# Altium PCB PCB1.PcbDoc
Units mm, origin at the board's own origin, x right, y up, seen from the top; angles counter-clockwise.
Board outline 103.8 x 74.9 mm, 2 copper layers (Top Layer, Bottom Layer); 9 components, 7 nets, 75 pads, 3 vias.
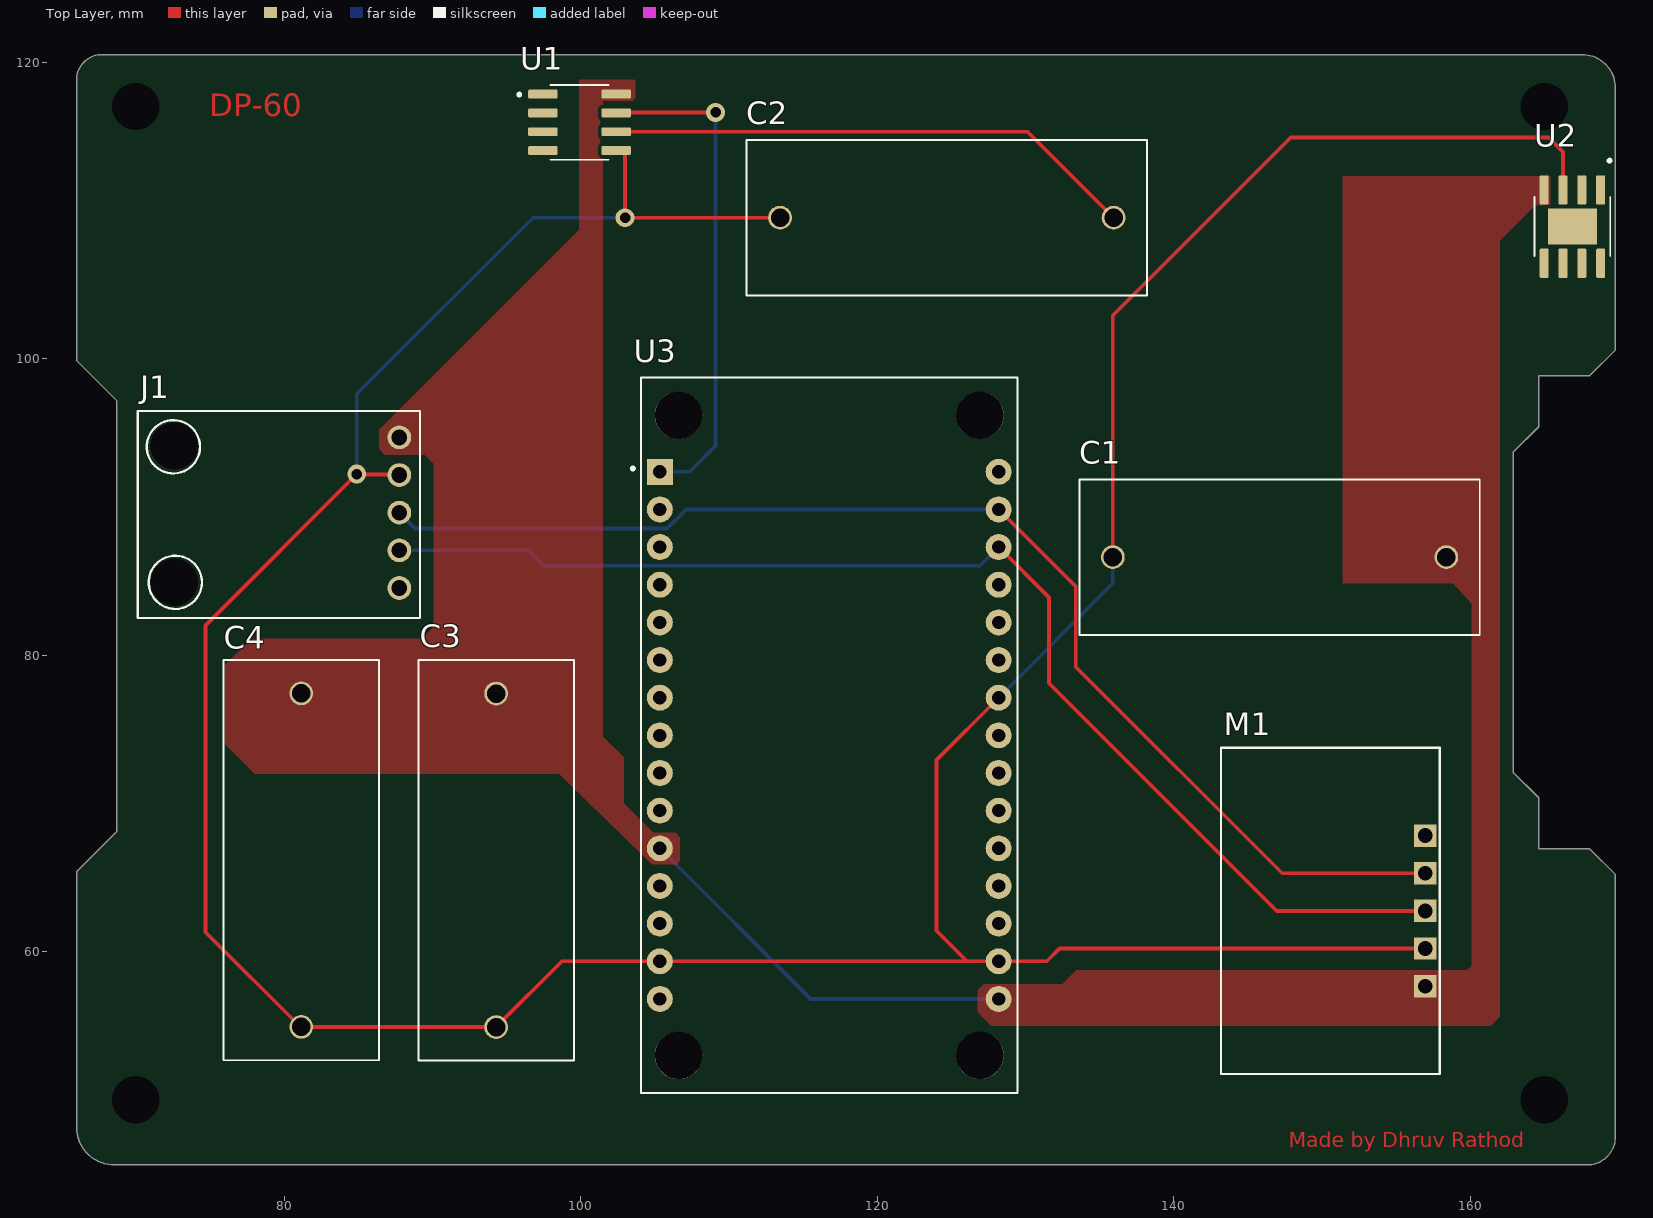
[diagram p0: Top Layer view]
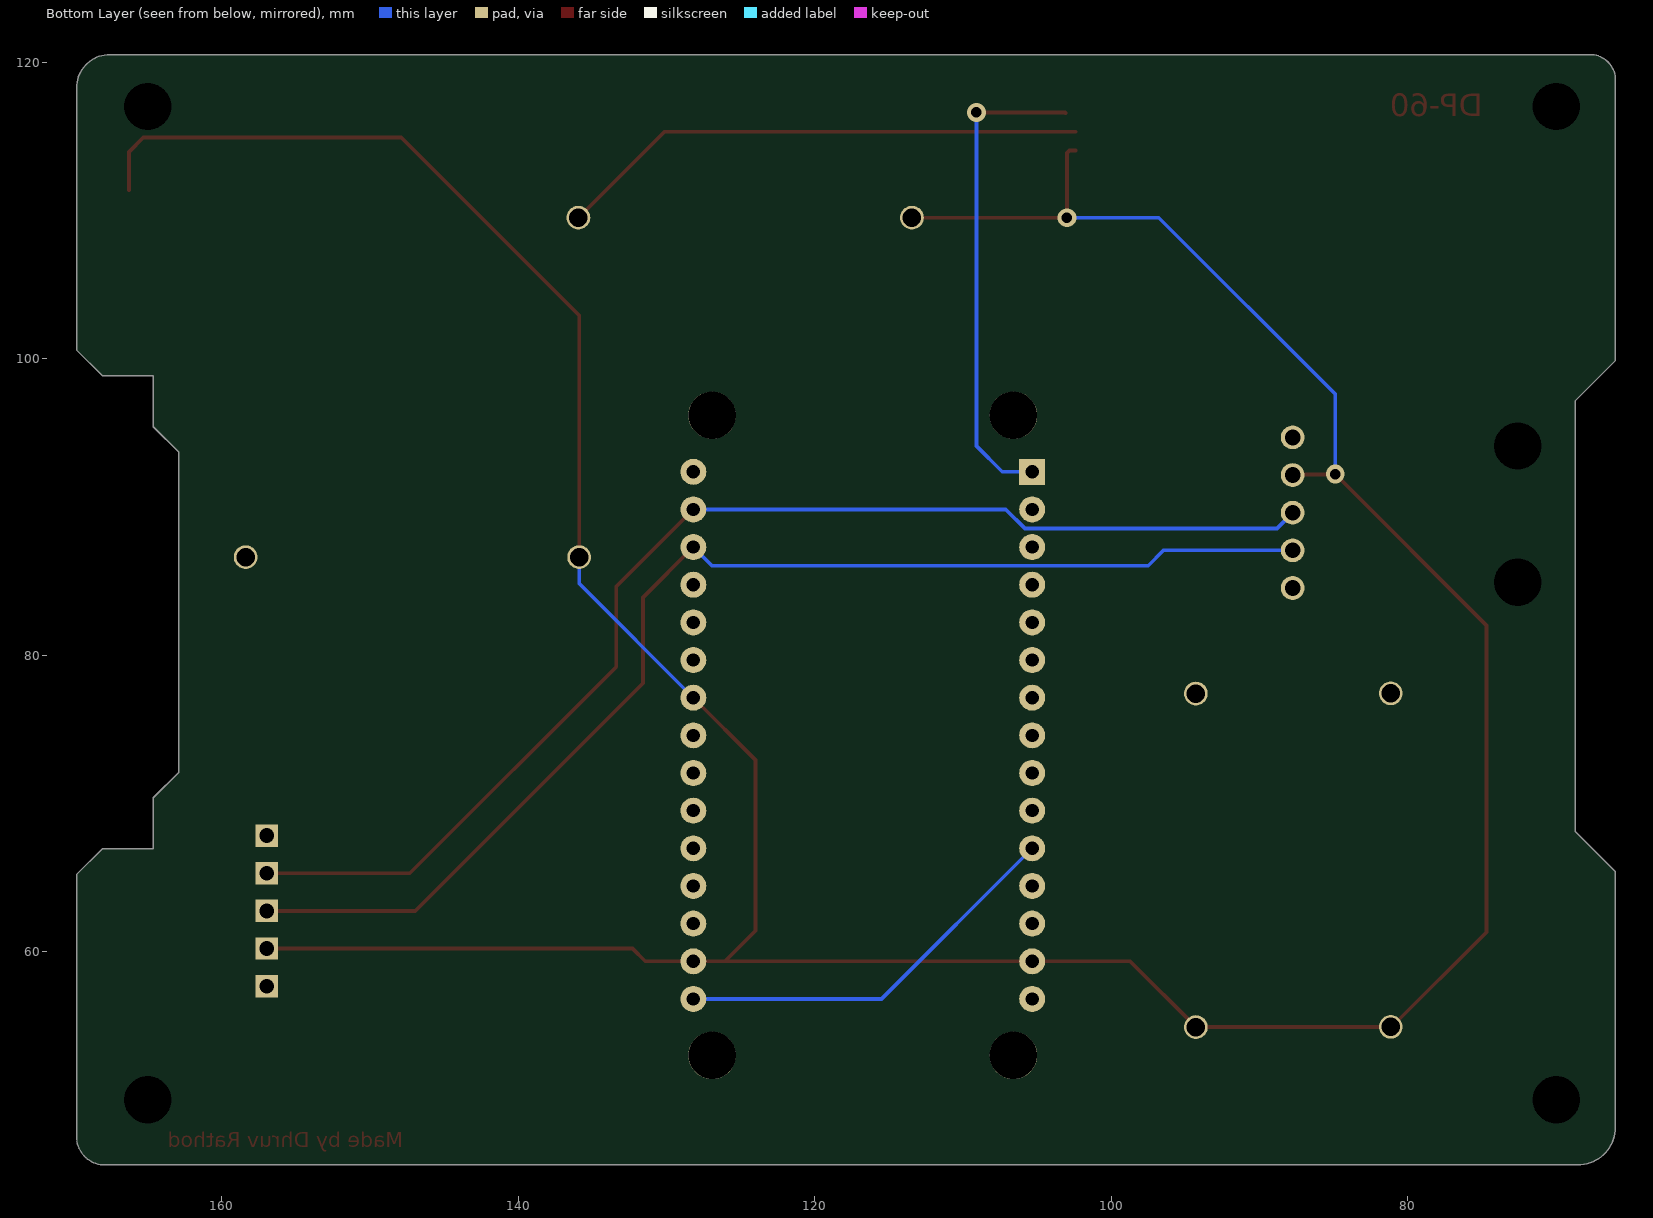
[diagram p1: Bottom Layer view, seen from below]
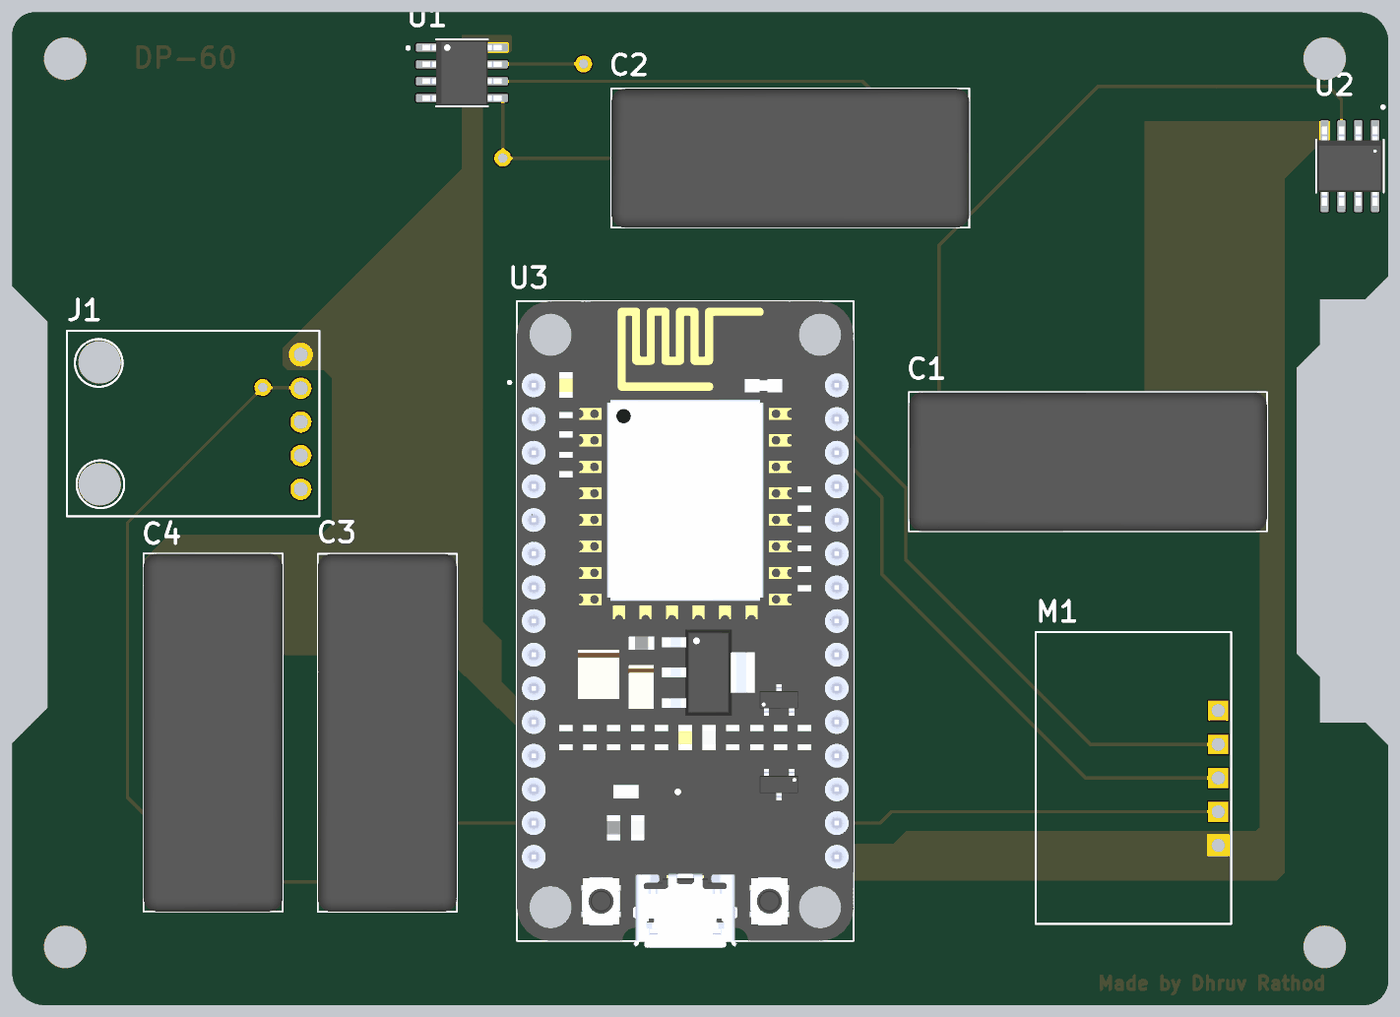
[diagram p2: 3D render of the assembled board from above, using the file's embedded part models]

## Layer stack, top to bottom
Top Solder: solder mask 0.0102, Solder Resist, Dk 3.5
Top Layer: signal copper 0.0356
Dielectric 1: dielectric 0.32, FR-4, Dk 4.8
Bottom Layer: signal copper 0.0356
Bottom Solder: solder mask 0.0102, Solder Resist, Dk 3.5

## Board outline
66,48.14 ccw(c68.54,48.14) 68.54,45.6 167.9,45.6 ccw(c167.9,47.5) 169.8,47.5 169.8,65.19 168.075,66.915 164.625,66.915 164.625,70.365 162.9,72.09 162.9,93.67 164.625,95.395 164.625,98.845 168.075,98.845 169.8,100.57 169.8,118.26 ccw(c167.56,118.26) 167.56,120.5 67.7,120.5 ccw(c67.7,118.8) 66,118.8 66,99.86 68.7,97.16 68.7,68.08 66,65.38

## Design rules (kind name [scope] priority, off if disabled: settings)
Clearance [All] p1: gap=0.254 ignorepadtopadclearanceinfootprint=FALSE
HoleSize HoleSize_1 [All] p1: absolutevalues=TRUE maxlimit=3.3 minlimit=0.025 maxpercent=80.000 minpercent=20.000
MinimumSolderMaskSliver "Sensor_SolderMask_Exception  " [Component = 'U2'] p1: minsoldermaskwidth=0.07
MinimumSolderMaskSliver [All] p2: minsoldermaskwidth=0.254
PolygonConnect [All] p1: connectstyle=Direct reliefconductorwidth=0.254 reliefentries=4 polygonreliefangle="90 Angle" airgapwidth=0.254
RoutingVias [All] p1: holewidth=0.711 width=1.27 viastyle="Through Hole" minholewidth=0.711 minwidth=1.27 maxholewidth=0.711 maxwidth=1.27
SilkToSolderMaskClearance Exception_For_Components [Component = 'M1'] p1: minsilkscreentomaskgap=0.14 clearancetoexposedcopper=TRUE
SilkToSolderMaskClearance SilkToSolderMaskClearance_1 [IsPad] p2: minsilkscreentomaskgap=0.254 clearancetoexposedcopper=TRUE
SolderMaskExpansion [All] p1: expansion=0.102 istentingtop=FALSE
SupplyNets "Schematic Supply Nets_1" [InNet('GND')] p1: voltage=0.000
SupplyNets "Schematic Supply Nets" [InNet('VCC')] p2: voltage=0.000
Width [All] p1: maxlimit=0.254 minlimit=0.254 preferedwidth=0.254
27 further rules are at their usual default settings.

## Components (designator, comment, footprint, x,y, rotation, side; value= is the part's Value field where it differs from the comment)
C1 "ECWFG2J105Q1" CAPRR2250W100L2700T1050H1900 147.15,86.6 r180 top
C2 "ECWFG2J105Q1" CAPRR2250W100L2700T1050H1900 124.7,109.5 r180 top
C3 "ECWFG2J105Q1" CAPRR2250W100L2700T1050H1900 94.3,66.15 r90 top
C4 "ECWFG2J105Q1" CAPRR2250W100L2700T1050H1900 81.153,66.167 r90 top
J1 "ZC362800#" ZC362800# 86.5,89.6 r270 top
M1 "SEN0142" SEN0142 155.702,62.738 r90 top
U1 "ACS712-20" SOIC127P600X175-8N 99.925,115.935 r0 top
U2 "TP4056" SOP127P600X175-9N 166.9,108.9 r270 top
U3 "ZC563900" MODULE_ZC563900 116.77,74.58 r0 top

## Footprints (in the part's own frame and the unit in brackets; to place one, negate y for a bottom-side part, rotate by r counter-clockwise, add the part's x,y. Pads: shape width x height; smd on the part's side, far side on the other; paste and mask are expansions set on the pad)
CAPRR2250W100L2700T1050H1900 [mm]
  round 1.6 hole 1.25: 1(-11.25,0) 2(11.25,0)
  silkscreen extent -13.5,-5.25 13.5,5.25, body extent -13.5,-5.25 13.5,5.25, height 19
MODULE_ZC563900 [mil]
  rect 69x69 / inner round 69 / far side rect 69x69 hole 35: 1(-450,700)
  round 69 hole 35: 2(-450,600) 3(-450,500) 4(-450,400) 5(-450,300) 6(-450,200) 7(-450,100) 8(-450,0) 9(-450,-100) 10(-450,-200) 11(-450,-300) 12(-450,-400) 13(-450,-500) 14(-450,-600) 15(-450,-700) 16(450,-700) 17(450,-600) 18(450,-500) 19(450,-400) 20(450,-300) 21(450,-200) 22(450,-100) 23(450,0) 24(450,100) 25(450,200) 26(450,300) 27(450,400) 28(450,500) 29(450,600) 30(450,700)
  round 125.98 hole 125.98 unplated: ""(-400,-850) ""(-400,850) ""(400,-850) ""(400,850)
  silkscreen extent -526,-950 500,950, body extent -500,-970 500,950, height 276
SEN0142 [mm]
  rect 1.508x1.508 / inner round 1.508 / far side rect 1.508x1.508 hole 1: 1(-5.08,-1.27) 2(-2.54,-1.27) 3(0,-1.27) 4(2.54,-1.27) 5(5.08,-1.27)
  silkscreen extent -11,-2.25 11,12.5
SOIC127P600X175-8N [mm]
  rrect25% 1.97x0.6 smd: 1(-2.475,1.905) 2(-2.475,0.635) 3(-2.475,-0.635) 4(-2.475,-1.905) 5(2.475,-1.905) 6(2.475,-0.635) 7(2.475,0.635) 8(2.475,1.905)
  silkscreen extent -4.16,-2.53 1.95,2.53, body extent -3,-2.45 3,2.45, height 1.75
SOP127P600X175-9N [mm]
  rrect25% 1.97x0.6 smd: 1(-2.475,1.905) 2(-2.475,0.635) 3(-2.475,-0.635) 4(-2.475,-1.905) 5(2.475,-1.905) 6(2.475,-0.635) 7(2.475,0.635) 8(2.475,1.905)
  rect 2.413x3.302 smd paste-3: 9(0,0)
  silkscreen extent -4.54,-2.55 2,2.6, body extent -3,-2.45 3,2.45, height 1.7
ZC362800# [mil]
  round 63 hole 42: ADDR(200,50) GND(-100,50) SCL(0,50) SDA(100,50) VCC(-200,50)
  silkscreen extent -270,-645 280,105

## Part data
C1 C2 C3 C4: "Metallized Polypropylene Film Capacitor", Package="MOLDED-2 Panasonic", Availability="In Stock", Check_prices=https://www.snapeda.com/parts/ECWFG2J105Q1/Panasonic/view-part/?ref=eda, MF=Panasonic, MP=ECWFG2J105Q1, Price=None, Purchase-URL=https://pricing.snapeda.com/search/part/ECWFG2J105Q1/?ref=eda, SnapEDA_Link=https://www.snapeda.com/parts/ECWFG2J105Q1/Panasonic/view-part/?ref=snap
J1: "1pc BH1750 Digital Ambient Light Intensity Sensor Module for Arduino GY-302", Package=None, Check_prices=https://www.snapeda.com/parts/ZC362800%23/YKS/view-part/?ref=eda, MF=YKS, MP=ZC362800#, SnapEDA_Link=https://www.snapeda.com/parts/ZC362800%23/YKS/view-part/?ref=snap
M1: "MPU-6050 series Accelerometer, Gyroscope, 3 Axis Sensor Evaluation Board", Package=None, Check_prices=https://www.snapeda.com/parts/SEN0142/DFRobot/view-part/?ref=eda, MF=DFRobot, MP=SEN0142, SnapEDA_Link=https://www.snapeda.com/parts/SEN0142/DFRobot/view-part/?ref=snap
U1: "ACS712: Fully Integrated, Hall-Effect-Based Linear Current Sensor IC with 2.1 kV RMS Voltage Isolation and a Low-Resistance Current Conductor", Package="SOIC-8 Allegro MicroSystems LLC", Check_prices=https://www.snapeda.com/parts/ACS712-20/Allegro/view-part/?ref=eda, MF="Allegro MicroSystems", MP=ACS712-20, SnapEDA_Link=https://www.snapeda.com/parts/ACS712-20/Allegro/view-part/?ref=snap
U2: Package=None, Check_prices=https://www.snapeda.com/parts/TP4056/Others/view-part/?ref=eda, MF=others, MP=TP4056, SnapEDA_Link=https://www.snapeda.com/parts/TP4056/Others/view-part/?ref=snap
U3: "NodeMcu Lua ESP8266 WIFI Internet of Things Network Development Module Board", Package=None, Check_prices=https://www.snapeda.com/parts/ZC563900/YKS/view-part/?ref=eda, MF=YKS, MP=ZC563900, SnapEDA_Link=https://www.snapeda.com/parts/ZC563900/YKS/view-part/?ref=snap

## Free pads (board coordinates)
  round 0 hole 3.2: 3(72.6,84.9) 3(72.6,94.1) MH1(70,117) MH2(70,50) MH3(165,50) MH4(165,117)

## Via types
v1: diameter 1.27, hole 0.711, Top Layer to Bottom Layer, 3 vias

## Nets (pads, with @x,y where several pads share a name; then routed paths per layer and width w, separated by ;. In a path a pad name is that pad's centre, name@x,y a point inside that pad or via, vN(x,y) a via of type N, cw(c..) or ccw(c..) an arc to the next point about the centre after c; other vN are vias at no path point)
GND: C1.2 C2.2 C3.1 C4.1 J1.GND M1.2 U1.5 U2.3 U3.14 U3.17 U3.24 | length 258.8
  Top Layer w0.254: J1.GND 87.74,92.17 84.93,92.17 v1(84.9,92.2) 74.7,82 74.7,61.3 81.083,54.917 C4.1 81.161,54.909 94.291,54.909 C3.1 98.74,59.34 U3.14 U3.17 ; U1.5 102.827,114.03 103,113.857 v1(103,109.5) C2.2 ; U3.24 124,72.92 124,61.4 126.06,59.34 U3.17 ; C1.2 135.9,102.9 147.9,114.9 165.3,114.9 166.265,113.935 U2.3 ; M1.2 132.298,60.198 131.44,59.34 U3.17
  Bottom Layer w0.254: v1(84.9,92.2) 84.9,97.6 96.8,109.5 v1(103,109.5) ; U3.24 135.9,84.82 C1.2
NetC1_1: C1.1 C3.2 C4.2 J1.VCC M1.1 U1.8 U2.4 U3.11 U3.16 | length 27.1
  Bottom Layer w0.254: U3.11 115.5,56.8 U3.16
NetC2_1: C2.1 U1.6 | length 36
  Top Layer w0.254: U1.6 130.15,115.3 C2.1
NetJ1_SCL: J1.SCL M1.4 U3.29 | length 83.5
  Top Layer w0.254: U3.29 133.4,84.62 133.4,79.2 147.322,65.278 M1.4
  Bottom Layer w0.254: J1.SCL 88.833,88.537 105.835,88.537 107.118,89.82 U3.29
NetJ1_SDA: J1.SDA M1.3 U3.28 | length 83.7
  Top Layer w0.254: J1.SDA@87.75,87.08 J1.SDA ; U3.28 131.6,83.88 131.6,78.1 146.962,62.738 M1.3
  Bottom Layer w0.254: J1.SDA 96.479,87.06 97.516,86.023 126.943,86.023 U3.28
NetU1_7: U1.7 U3.1 | length 33
  Top Layer w0.254: U1.7@103.1,116.57 103.13,116.6 v1(109.1,116.6)
  Bottom Layer w0.254: U3.1 107.36,92.36 109.1,94.1 v1(109.1,116.6)
VCC: U3.15
pads on no net: J1.ADDR M1.5 U1.1 U1.2 U1.3 U1.4 U2.1 U2.2 U2.5 U2.6 U2.7 U2.8 U2.9 U3. U3.2 U3.3 U3.4 U3.5 U3.6 U3.7 U3.8 U3.9 U3.10 U3.12 U3.13 U3.18 U3.19 U3.20 U3.21 U3.22 U3.23 U3.25 U3.26 U3.27 U3.30

## Polygon pours and split planes (outlines as drawn)
NetC1_1 on Top Layer "NETC1_1_L01_P010" (solid, pour order 10): 155.831,58.747 133.447,58.747 132.5,57.8 127.2,57.8 126.8,57.4 126.8,55.9 127.7,55 161.4,55 162,55.6 162,57.4
NetC1_1 on Top Layer "NETC1_1_L01_P009" (solid, pour order 9): 104.3,66.4 104.8,65.9 106.5,65.9 106.7,66.1 106.7,67.7 106.4,68 104.9,68 102.9,70 102.9,73.1 101.4,74.6 99.7,72.9 97.6,72.9
NetC1_1 on Top Layer "NETC1_1_L01_P006" (solid, pour order 6): 101.5,117.4 103.5,117.4 103.7,117.6 103.7,118.7 103.6,118.8 99.9,118.8 99.9,108.7 86.4,95.2 86.4,93.9 86.8,93.5 89.5,93.5 90.1,92.9 90.1,81.9 89.3,81.1 77.8,81.1 76,79.3 76,74 78,72 100.1,72 100.1,72.012 101.5,73.1
NetC1_1 on Top Layer "NETC1_1_L01_P003" (solid, pour order 3): 159.8,58.75 155.65,58.75 155.65,57.15 156.3,56.65 156.55,56.65 161.45,56.65 162,57.2 162,60.6
NetC1_1 on Top Layer "NETC1_1_L01_P002" (solid, pour order 2): 158.8,84.9 160.1,83.455 160.1,58.7 161.7,58.7 162,59 162,86.6 161,87.6
NetC1_1 on Top Layer "NETC1_1_L01_P001" (solid, pour order 1): 162,84.85 162,107.95 164.4,110.35 165.4,110.35 165.4,112.3 151.4,112.3 151.4,84.85

## Other copper
Top Layer:
  text "DP-60" at 74.954,116.354 h1.52
  text "Made by Dhruv Rathod" at 147.754,46.787 h1